# Altium PCB PBL4_PCB.PcbDoc (part 1 of 2)
Units mm, origin at the board's own origin, x right, y up, seen from the top; angles counter-clockwise.
Board outline 110 x 80 mm, 2 copper layers (Top Layer, Bottom Layer); 81 components, 62 nets, 303 pads, 24 vias.
Unrouted connection lines stored in the file: 115.
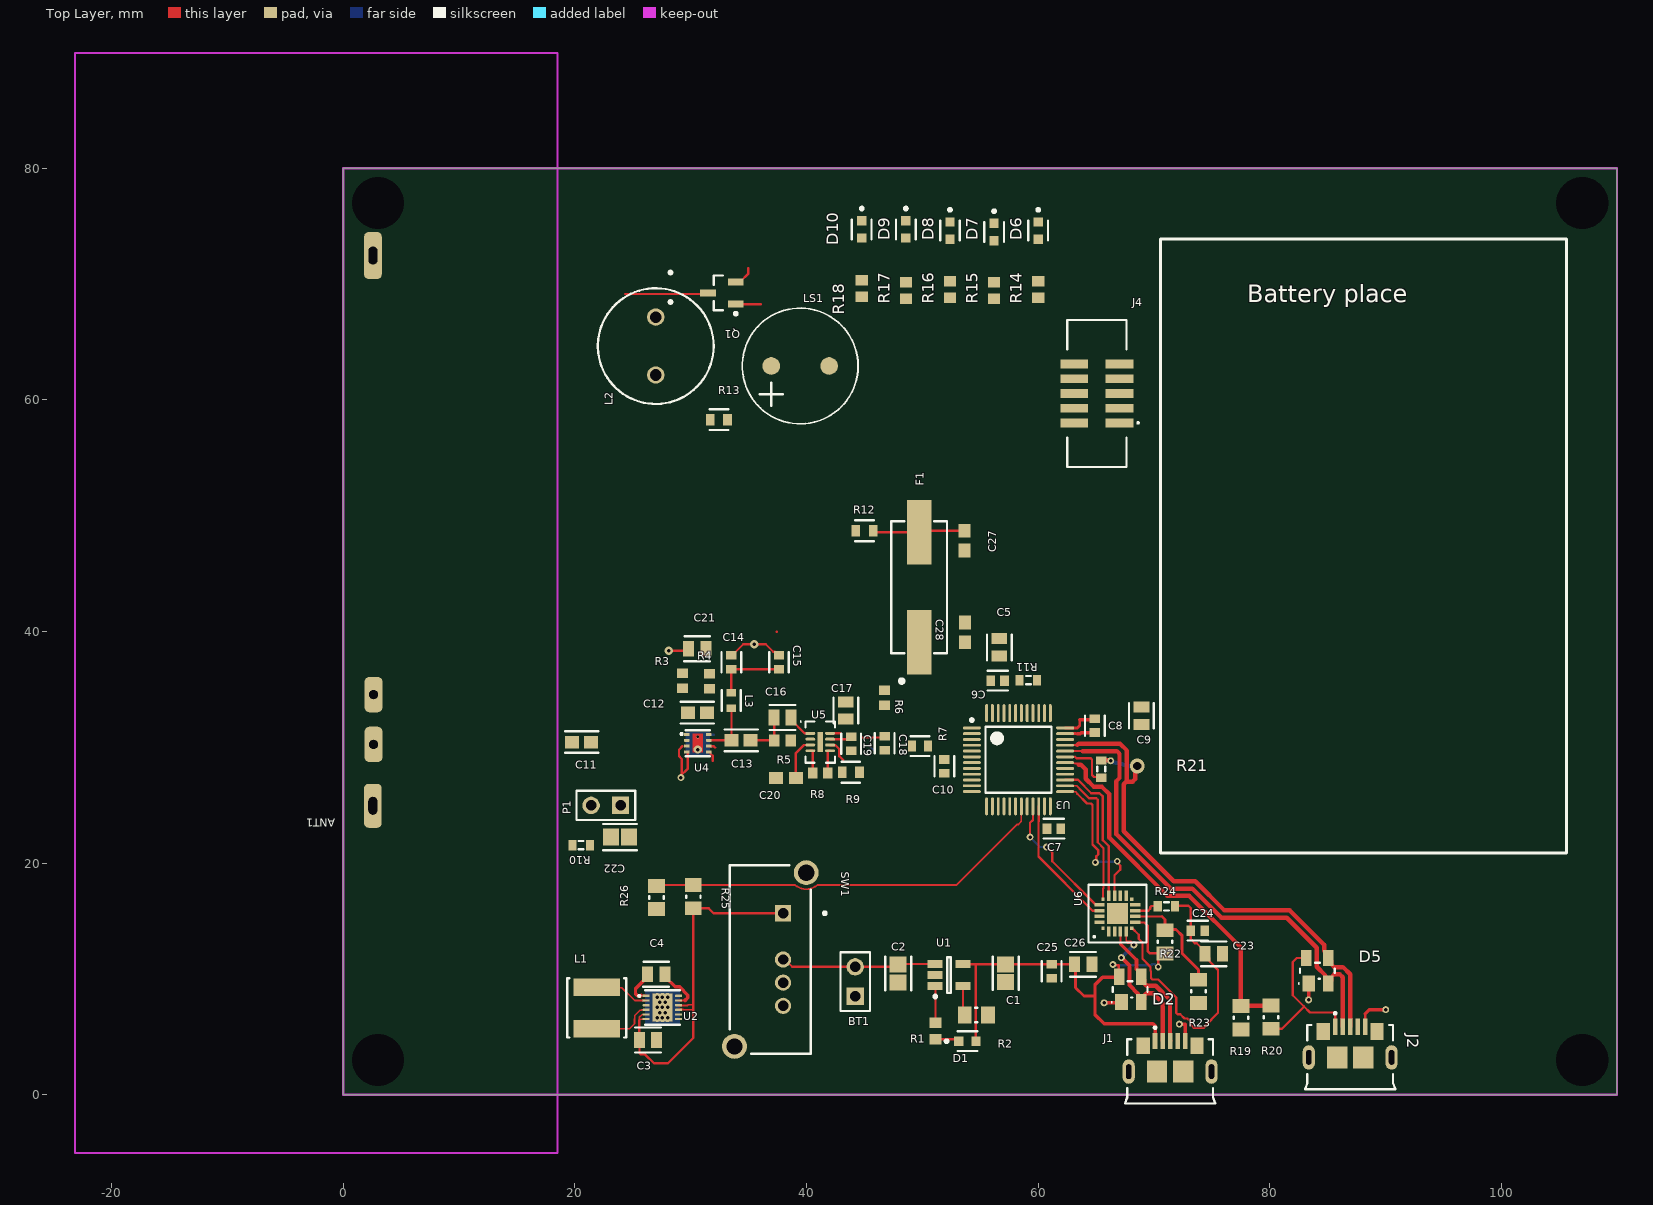
[diagram p0: Top Layer view]
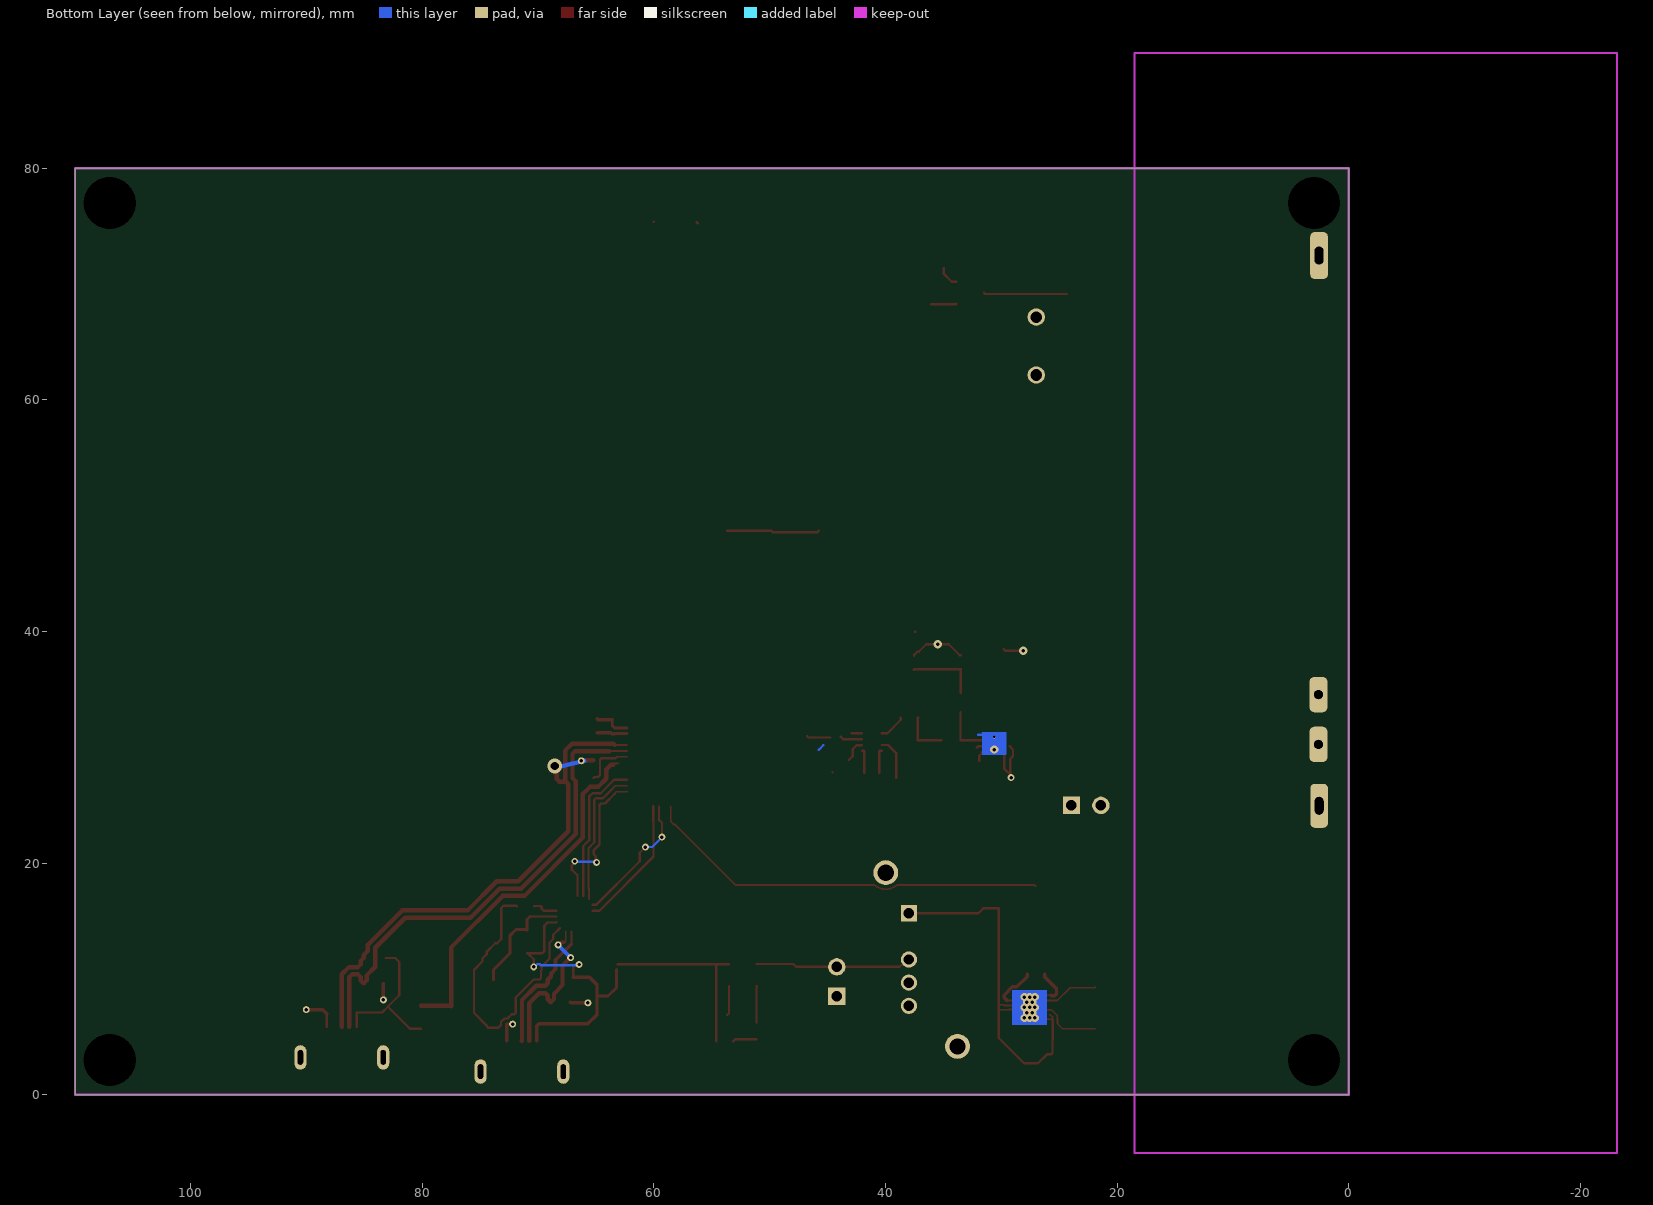
[diagram p1: Bottom Layer view, seen from below]

## Layer stack, top to bottom
Top Solder: solder mask 0.0102, Solder Resist, Dk 3.5
Top Layer: signal copper 0.0356
Dielectric 1: dielectric 0.32, FR-4, Dk 4.8
Bottom Layer: signal copper 0.0356
Bottom Solder: solder mask 0.0102, Solder Resist, Dk 3.5

## Board outline
0,0 0,80 110,80 110,0

## Design rules (kind name [scope] priority, off if disabled: settings)
Clearance [All] p1: gap=0.2 ignorepadtopadclearanceinfootprint=TRUE except(0: Arc-Hole Track-Hole SMDPad-Hole THPad-Hole Via-Hole Fill-Hole Poly-Hole Region-Hole Text-Hole)
DiffPairsRouting [All] p1: maxlimit=0.254 minlimit=0.254 mostfreqgap=0.254 toplayer_minwidth=0.15 toplayer_maxwidth=0.381 toplayer_prefwidth=0.381 bottomlayer_minwidth=0.15 bottomlayer_maxwidth=0.381 bottomlayer_prefwidth=0.381 maxuncoupledlength=12.7
PolygonConnect [All] p1: connectstyle=Relief reliefconductorwidth=0.254 reliefentries=4 polygonreliefangle="90 Angle" airgapwidth=0.254
RoutingVias [All] p1: holewidth=0.711 width=1.27 viastyle="Through Hole" minholewidth=0.711 minwidth=1.27 maxholewidth=0.711 maxwidth=1.27
SolderMaskExpansion [All] p1: expansion=0.102 istentingtop=FALSE
Width [All] p1: maxlimit=1 minlimit=0.15 preferedwidth=0.3
29 further rules are at their usual default settings.

## Classes and differential pairs
differential pair USB: +USB_P -USB_N
differential pair USB_UART: +USB_UART_P -USB_UART_N

## Components (designator, comment, footprint, x,y, rotation, side; value= is the part's Value field where it differs from the comment)
ANT1 "2195852-1" ANTENA 8.91,0.6 r90 top
BT1 "Battery" HDR1X2 44.21,8.5 r90 top
C1 "" FP-C2012-125-0_2-IPC_B 57.204,10.486 r270 top
C2 "" FP-C2012-125-0_2-IPC_B 47.92,10.47 r270 top
C3 "" FP-C0805C-DG-MFG 26.32,4.72 r0 top value=10μ
C4 "" FP-C0805C-DG-MFG 27.02,10.39 r0 top value=10μ
C5 "C0805C470J1GACTU" FP-C0805C-DN-MFG 56.66,38.625 r90 top value=10u
C6 "C0603C103K1RACTU" FP-C0603C-CF-MFG 56.51,35.75 r180 top value="10,000 pF"
C7 "C0603C103K1RACTU" FP-C0603C-CF-MFG 61.37,22.98 r0 top value="10,000 pF"
C8 "C0603C103K1RACTU" FP-C0603C-CF-MFG 64.905,31.87 r90 top value="10,000 pF"
C9 "C0805C470J1GACTU" FP-C0805C-DN-MFG 68.93,32.73 r270 top value=1u
C10 "C0603C103K1RACTU" FP-C0603C-CF-MFG 51.91,28.35 r270 top value="10,000 pF"
C11 "06035C102KAT2A" FP-0603-L_1_6_0_15-W_0_81-IPC_A 20.584,30.45 r0 top
C12 "06035C102KAT2A" FP-0603-L_1_6_0_15-W_0_81-IPC_A 30.58,32.996 r180 top
C13 "06035C102KAT2A" FP-0603-L_1_6_0_15-W_0_81-IPC_A 34.36,30.6 r0 top
C14 "C0603C103K1RACTU" FP-C0603C-CF-MFG 33.51,37.35 r270 top value="10,000 pF"
C15 "C0603C103K1RACTU" FP-C0603C-CF-MFG 37.631,37.35 r270 top value="10,000 pF"
C16 "C0805C470J1GACTU" FP-C0805C-DN-MFG 37.935,32.575 r0 top value=47p
C17 "C0805C470J1GACTU" FP-C0805C-DN-MFG 43.406,33.175 r270 top value=47p
C18 "C0603C104K5RACTU" FP-C0603C-CF-MFG 46.76,30.35 r270 top value="0.10 μF"
C19 "C0603C104K5RACTU" FP-C0603C-CF-MFG 43.856,30.3 r270 top value="0.10 μF"
C20 "06035J8R2BBSTR" CAPC1608X73X35ML10T15 38.235,27.35 r0 top
C21 "" FP-C0805C-DG-MFG 30.556,38.496 r180 top value=10μ
C22 "" FP-C2012-125-0_2-IPC_B 23.891,22.245 r0 top
C23 "C0805C470J1GACTU" FP-C0805C-DN-MFG 75.18,12.16 r0 top value=4u7
C24 "C0603C103K1RACTU" FP-C0603C-CF-MFG 73.8,14.17 r180 top value="10,000 pF"
C25 "C0603C103K1RACTU" FP-C0603C-CF-MFG 61.18,10.65 r90 top value="10,000 pF"
C26 "C0805C470J1GACTU" FP-C0805C-DN-MFG 63.89,11.25 r0 top value=4u7
C27 "06035J8R2BBSTR" CAPC1608X73X35ML10T15 53.66,47.85 r90 top
C28 "06035J8R2BBSTR" CAPC1608X73X35ML10T15 53.685,39.925 r90 top
D1 "LTST-C190GKT" FP-LTST-C190GKT-MFG 53.9,4.62 r0 top
D2 "SP0503BAHTG" LFUS-SOT143-4_V 67.96,9.09 r90 top
D5 "SP0503BAHTG" LFUS-SOT143-4_V 84.13,10.7 r90 top
D6 "LTST-C190GKT" FP-LTST-C190GKT-MFG 60.015,74.615 r270 top
D7 "LTST-C190GKT" FP-LTST-C190GKT-MFG 56.205,74.5 r270 top
D8 "LTST-C190GKT" FP-LTST-C190GKT-MFG 52.395,74.615 r270 top
D9 "LTST-C190GKT" FP-LTST-C190GKT-MFG 48.585,74.73 r270 top
D10 "LTST-C190GKT" FP-LTST-C190GKT-MFG 44.775,74.73 r270 top
F1 "12MHz" HC/49US-(AT49)_1 49.735,43.825 r90 top
J1 "USB3075-30-A" GCT_USB3075-30-A 70.105,4.64 r0 top
J2 "USB3075-30-A" GCT_USB3075-30-A 85.66,5.87 r0 top
J4 "SWD - STM32" 322110030000 65.085,60.55 r90 top
L1 "NRS5040T2R2NMGJ" FP-NR5040-H_4_1-MFG 21.88,7.49 r90 top
L2 "7447471104" "WE-TIS 1111" 26.985,64.65 r270 top
L3 "LQW18ANR10G00D" FP-LQW18AN_00-MFG 33.51,34.037 r90 top
LS1 "7BB-20-6L0" FP-7BB-20-6L0-MFG 39.46,62.93 r90 top
P1 "Reset" HDR1X2 23.945,24.985 r180 top
Q1 "BC847A" INF-SOT23_M 32.7,69.25 r180 top
R1 "ERJ-3EKF4700V" RESC1608X55X30ML15T15 51.15,5.5 r90 top
R2 "RC0805FR-073K3L" RESC2013X60X35ML10T20 54.67,6.88 r0 top
R3 "CRCW06030000Z0EA" RESC1609X50X30NL8T20 29.306,35.746 r90 top value=0
R4 "CRCW06030000Z0EA" RESC1609X50X30NL8T20 31.606,35.696 r90 top value=0
R5 "ERJ-3EKF52R3V" RESC1608X55X30ML15T15 37.935,30.6 r0 top
R6 "CRCW06030000Z0EA" RESC1609X50X30NL8T20 46.756,34.275 r90 top
R7 "MCT06030D5000BP100" FP-MCT0603-MFG 49.806,30.096 r180 top
R8 "CRCW06030000Z0EA" RESC1609X50X30NL8T20 41.185,27.775 r0 top
R9 "CRCW06031K00FKEA" FP-CRCW0603-e3-MFG 43.831,27.85 r0 top
R10 "Res3" J1-0603 20.54,21.55 r0 top value=10k
R11 "Res3" J1-0603 59.16,35.8 r180 top value=10k
R12 "CRCW06031K00FKEA" FP-CRCW0603-e3-MFG 45.01,48.7 r0 top
R13 "CRCW06031K00FKEA" FP-CRCW0603-e3-MFG 32.435,58.3 r0 top
R14 "ERJ-3EKF4700V" RESC1608X55X30ML15T15 60.015,69.535 r90 top
R15 "ERJ-3EKF4700V" RESC1608X55X30ML15T15 56.205,69.445 r90 top
R16 "ERJ-3EKF4700V" RESC1608X55X30ML15T15 52.395,69.535 r90 top
R17 "ERJ-3EKF4700V" RESC1608X55X30ML15T15 48.585,69.445 r90 top
R18 "ERJ-3EKF4700V" RESC1608X55X30ML15T15 44.775,69.625 r90 top
R19 "RC0805FR-073K3L" RESC2013X60X35ML10T20 77.52,6.64 r270 top
R20 "RC0805FR-073K3L" RESC2013X60X35ML10T20 80.12,6.69 r90 top
R21 "Res3" J1-0603 65.46,28.12 r90 top value=1k5
R22 "RC0805FR-073K3L" RESC2013X60X35ML10T20 70.97,13.2 r270 top
R23 "RC0805FR-073K3L" RESC2013X60X35ML10T20 73.87,8.92 r90 top
R24 "Res3" J1-0603 71.09,16.26 r180 top value=1k
R25 "RC0805FR-073K3L" RESC2013X60X35ML10T20 30.23,17.1 r90 top
R26 "RC0805FR-073K3L" RESC2013X60X35ML10T20 27.04,17.03 r270 top
SW1 "MHS133G04" Alcoswitch_MHS133G04_0 36.88,11.67 r90 top
U1 "MCP73832T-3ACI/OT" SOT-23-OT5_M 52.32,10.33 r0 top
U2 "ISL9110" KM_L12.3x3C 27.56,7.53 r0 top
U3 "STM32F103CBT6" STM-LQFP48_L 58.31,28.925 r0 top
U4 "TRF37D73" JD_WSON-8 30.61,30.35 r0 top
U5 "AD8319ACPZ-R7" ADI-CP-8-1_L 41.185,30.45 r0 top
U6 "CP2102N" ZW_QFN20 66.86,15.64 r90 top

## Footprints (in the part's own frame and the unit in brackets; to place one, negate y for a bottom-side part, rotate by r counter-clockwise, add the part's x,y. Pads: shape width x height; smd on the part's side, far side on the other; paste and mask are expansions set on the pad)
322110030000 [mm]
  rect 0.76x2.4 smd: 1(-2.54,-1.95) 2(-2.54,1.95) 3(-1.27,-1.95) 4(-1.27,1.95) 5(0,-1.95) 6(0,1.95) 7(1.27,-1.95) 8(1.27,1.95) 9(2.54,-1.95) 10(2.54,1.95)
  silkscreen extent -6.35,-3.6 6.35,2.55, body extent -6.32,-3.07 6.32,3.07, height 5.9
ADI-CP-8-1_L [mm] "SON, 8-Leads, Body 3x2mm, Pitch 0.5mm, Thermal Pad 1.75x0.45mm, IPC High Density"
  oval 0.85x0.25 smd: 1(-0.85,0.75) 2(-0.85,0.25) 3(-0.85,-0.25) 4(-0.85,-0.75) 5(0.85,-0.75) 6(0.85,-0.25) 7(0.85,0.25) 8(0.85,0.75)
  rect 0.45x1.75 smd: 9(0,0)
  silkscreen extent -1.72,-1.78 1.28,1.82, body extent -1.12,-1.63 1.13,1.63, height 1
Alcoswitch_MHS133G04_0 [mm]
  rect 1.4x1.4 hole 0.9 paste-1000 mask+0: 1(4,-1.1)
  round 1.4 hole 0.9 paste-1000 mask+0: 2(0,-1.1) 3(-2,-1.1) 4(-4,-1.1)
  round 2.15 hole 1.4 paste-1000 mask+0: 5(-7.5,3.1) 6(7.5,-3.1)
  silkscreen extent -8.15,-4.83 8.15,3.5, body extent -8.67,-4.28 8.67,4.28, height 0.25
ANTENA [mm] "Antena"
  rrect50% 3.8x1.524 hole 0.762 slot 1.52 at 0 deg: 1(24.35,6.353)
  rrect50% 3.05x1.524 hole 0.762 slot 0.76 at 0 deg: 2(29.65,6.3) 3(33.95,6.3)
  rrect50% 4.06x1.524 hole 0.762 slot 1.52 at 0 deg: 4(71.87,6.35)
  Keep-Out Layer region: -5.64,-9.59 89.36,-9.59 89.36,32.08 -5.64,32.08
  Keep-Out Layer lines w0.2: -5.64,32.08 -5.64,-9.59 89.36,-9.59 89.36,32.08 -5.64,32.08
  body extent 19.34,5.54 74.34,7.16, height 20
CAPC1608X73X35ML10T15 [mm] "Chip Capacitor, 2-Leads, Body 1.60x0.81mm, IPC Low Density"
  rect 1.2x1.05 smd: 1(-0.85,0) 2(0.85,0)
  body extent -0.85,-0.46 0.85,0.46, height 0.73
FP-7BB-20-6L0-MFG [mil]
  round 60 smd: 24(0,-98.43) 25(0,98.43)
  silkscreen extent -197,-197 197,197
FP-0603-L_1_6_0_15-W_0_81-IPC_A [mil]
  rect 47.5x42.06 smd paste+0 mask+0: 1(-32.51,0) 2(32.51,0)
  silkscreen extent -56,-37 56,37, body extent -31,-16 31,16, height 35
FP-C0603C-CF-MFG [mm]
  rect 0.75x0.9 smd paste+0 mask+0: 1(-0.6,0) 2(0.6,0)
  silkscreen extent -0.87,-0.85 0.88,0.85, body extent -1.2,-0.6 1.2,0.6, height 0.25
FP-C0805C-DG-MFG [mm]
  rect 0.95x1.35 smd paste+0 mask+0: 1(-0.75,0) 2(0.75,0)
  silkscreen extent -1.11,-1.08 1.1,1.07, body extent -1.4,-0.85 1.4,0.85, height 0.25
FP-C0805C-DN-MFG [mm]
  rect 0.95x1.35 smd paste+0 mask+0: 1(-0.75,0) 2(0.75,0)
  silkscreen extent -1.1,-1.07 1.1,1.07, body extent -1.4,-0.85 1.4,0.85, height 0.25
FP-C2012-125-0_2-IPC_B [mm]
  rect 1.378x1.456 smd paste+0 mask+0: 1(-0.764,0) 2(0.764,0)
  silkscreen extent -1.45,-1.13 1.45,1.13, body extent -1,-0.63 1,0.63, height 1.45
FP-CRCW0603-e3-MFG [mm]
  rect 0.75x1 smd paste+0 mask+0: 1(-0.75,0) 2(0.75,0)
  silkscreen extent -0.8,-0.9 0.8,0.9, body extent -0.78,-0.42 0.77,0.43, height 0.5
FP-LQW18AN_00-MFG [mm]
  rect 0.625x0.85 smd paste+0 mask+0: 1(-0.663,0) 2(0.663,0)
  silkscreen extent -0.9,-0.82 0.9,0.82, body extent -0.8,-0.4 0.8,0.4, height 1
FP-LTST-C190GKT-MFG [mm]
  rect 0.8x0.8 smd paste+0 mask+0: 1(-0.75,0) 2(0.75,0)
  silkscreen extent -1.92,-0.85 0.85,0.85, body extent -0.8,-0.4 0.8,0.4, height 0.9
FP-MCT0603-MFG [mm]
  rect 0.7x0.95 smd paste+0 mask+0: 1(-0.675,0) 2(0.675,0)
  silkscreen extent -0.8,-0.85 0.8,0.85, body extent -0.77,-0.42 0.78,0.42, height 0.55
FP-NR5040-H_4_1-MFG [mm]
  rect 1.5x4 smd paste+0 mask+0: 1(-1.8,0) 2(1.8,0)
  silkscreen extent -2.55,-2.55 2.55,2.55, body extent -2.65,-2.65 2.65,2.65, height 0.25
GCT_USB3075-30-A [mm]
  rect 0.4x1.4 smd: 1(0,0) 2(0.65,0) 3(1.3,0) 4(1.95,0) 5(2.6,0)
  rect 1.15x1.45 smd: S1(-1.02,-0.42) S2(3.62,-0.42)
  rect 1.75x1.9 smd: S3(0.175,-2.65) S4(2.425,-2.65)
  oval 1.05x2.1 hole 0.45 slot 1.25 at 90 deg: S5(-2.275,-2.65) S6(4.875,-2.65)
  silkscreen extent -2.6,-5.4 5.2,1.25
HC/49US-(AT49)_1 [mm]
  rect 5.6x2.1 smd: 1(-4.75,0) 2(4.75,0)
  silkscreen extent -8.23,-2.4 5.7,2.4, body extent -6.35,-2.35 6.35,2.35, height 1.5
HDR1X2 [mm] "Connector; Header; 2 Position"
  rect 1.5x1.5 hole 0.9: 1(0,0)
  round 1.5 hole 0.9: 2(2.54,0)
  silkscreen extent -1.27,-1.27 3.81,1.27
INF-SOT23_M [mm] "SOT23, 3-Leads, Body 2.9x1.3 mm, Pitch 0.95 mm, IPC Low Density"
  rect 1.35x0.6 smd: 1(-1.2,0.95) 2(-1.2,-0.95) 3(1.2,0)
  silkscreen extent -1.33,-1.5 0.7,1.92, body extent -0.7,-1.5 0.7,1.5, height 1.1
J1-0603 [mm] "Chip Resistor, Body 1.6x0.8mm, IPC High Density"
  rect 0.7x0.9 smd: 1(-0.75,0) 2(0.75,0)
  silkscreen extent -0.2,-0.35 0.2,0.35, body extent -0.85,-0.48 0.85,0.48, height 0.9
JD_WSON-8 [mm] "JD_WSON-8"
  rrect50% 0.5x0.25 smd paste+0: 1(-0.95,0.75) 2(-0.95,0.25) 3(-0.95,-0.25) 4(-0.95,-0.75) 5(0.95,-0.75) 6(0.95,-0.25) 7(0.95,0.25) 8(0.95,0.75)
  round 0.25 hole 0.2: 9(0,0.55)
  Top Layer region: -0.45,0.8 0.45,0.8 0.45,-0.8 -0.45,-0.8
  Bottom Layer region: -1.05,0.95 1.075,0.95 1.025,0.9 1.025,-0.975 -1,-0.975 -1.025,-0.95
  silkscreen extent -1.46,-1.13 1.05,1.11
KM_L12.3x3C [mm] "KM_L12.3x3C"
  rrect10% 0.6x0.2 smd: 1(-1.4,1)
  rrect50% 0.6x0.2 smd: 2(-1.4,0.6) 3(-1.4,0.2) 4(-1.4,-0.2) 5(-1.4,-0.6) 6(-1.4,-1) 7(1.4,-1) 8(1.4,-0.6) 9(1.4,-0.2) 10(1.4,0.2) 11(1.4,0.6) 12(1.4,1)
  rect 1.7x2.45 smd: PAD(0,0)
  Bottom Layer region: -1.5,1.5 1.5,1.5 1.5,-1.5 -1.5,-1.5
  silkscreen extent -2.05,-1.5 1.5,1.5
LFUS-SOT143-4_V [mm] "SOT143, 4-Leads, Body 3.04x1.4mm, Pitch 1.90mm"
  rect 1.4x1.1 smd: 1(-1.1,0.75)
  rect 1.4x0.9 smd: 2(-1.1,-0.95) 3(1.1,-0.95) 4(1.1,0.95)
  silkscreen extent -1.15,-1.5 0.7,1.65, body extent -0.7,-1.52 0.7,1.52, height 1.22
RESC1608X55X30ML15T15 [mm] "Chip Resistor, 2-Leads, Body 1.75x0.95mm, IPC Low Density"
  rect 0.9x1.05 smd: 1(-0.725,0) 2(0.725,0)
  body extent -0.87,-0.48 0.87,0.48, height 0.55
RESC1609X50X30NL8T20 [mm] "Chip Resistor, 2-Leads, Body 1.65x0.95mm, IPC Medium Density"
  rect 0.8x0.95 smd: 1(-0.65,0) 2(0.65,0)
  body extent -0.83,-0.48 0.82,0.47, height 0.5
RESC2013X60X35ML10T20 [mm] "Chip Resistor, 2-Leads, Body 2.1x1.35mm, IPC Low Density"
  rect 1.2x1.45 smd: 1(-1,0) 2(1,0)
  silkscreen extent -0.1,-0.63 0.1,0.63, body extent -1.05,-0.67 1.05,0.68, height 0.6
SOT-23-OT5_M [mm] "SOT23, 5-Leads, Body 2.9x1.7mm, Pitch 0.95mm, Lead Span 2.8mm, IPC Low Density"
  rect 1.3x0.7 smd: 1(-1.2,-0.95) 2(-1.2,0) 3(-1.2,0.95) 4(1.2,0.95) 5(1.2,-0.95)
  silkscreen extent -1.32,-1.97 0.15,1.55, body extent -0.9,-1.55 0.9,1.55, height 1.45
STM-LQFP48_L [mm] "QFP, 48-Leads, Body 7x7mm, Pitch 0.5mm, IPC High Density"
  oval 1.55x0.25 smd: 1(-4.025,2.75) 2(-4.025,2.25) 3(-4.025,1.75) 4(-4.025,1.25) 5(-4.025,0.75) 6(-4.025,0.25) 7(-4.025,-0.25) 8(-4.025,-0.75) 9(-4.025,-1.25) 10(-4.025,-1.75) 11(-4.025,-2.25) 12(-4.025,-2.75) 25(4.025,-2.75) 26(4.025,-2.25) 27(4.025,-1.75) 28(4.025,-1.25) 29(4.025,-0.75) 30(4.025,-0.25) 31(4.025,0.25) 32(4.025,0.75) 33(4.025,1.25) 34(4.025,1.75) 35(4.025,2.25) 36(4.025,2.75)
  oval 0.25x1.55 smd: 13(-2.75,-4.025) 14(-2.25,-4.025) 15(-1.75,-4.025) 16(-1.25,-4.025) 17(-0.75,-4.025) 18(-0.25,-4.025) 19(0.25,-4.025) 20(0.75,-4.025) 21(1.25,-4.025) 22(1.75,-4.025) 23(2.25,-4.025) 24(2.75,-4.025) 37(2.75,4.025) 38(2.25,4.025) 39(1.75,4.025) 40(1.25,4.025) 41(0.75,4.025) 42(0.25,4.025) 43(-0.25,4.025) 44(-0.75,4.025) 45(-1.25,4.025) 46(-1.75,4.025) 47(-2.25,4.025) 48(-2.75,4.025)
  silkscreen extent -4.15,-2.85 2.85,3.55, body extent -3.5,-3.5 3.5,3.5, height 1.6
"WE-TIS 1111" [mm] "THT, 2-Leads, Body 11,0x11,0mm, Pitch 5mm"
  round 1.5 hole 1: 1(-2.5,0) 2(2.5,0)
  silkscreen extent -6.47,-5 5,5, body extent -7.46,-7.5 7.53,7.5, height 10.5
ZW_QFN20 [mm] "ZW_QFN20"
  rect 0.3x0.3 smd: 1(-1.25,1.25) 6(-1.25,-1.25) 11(1.25,-1.25) 16(1.25,1.25)
  rect 0.9x0.3 smd: 2(-1.55,0.75) 3(-1.55,0.25) 4(-1.55,-0.25) 5(-1.55,-0.75) 12(1.55,-0.75) 13(1.55,-0.25) 14(1.55,0.25) 15(1.55,0.75)
  rect 0.3x0.9 smd: 7(-0.75,-1.55) 8(-0.25,-1.55) 9(0.25,-1.55) 10(0.75,-1.55) 17(0.75,1.55) 18(0.25,1.55) 19(-0.25,1.55) 20(-0.75,1.55)
  rect 1.8x1.8 smd: 21(0,0)
  silkscreen extent -2.5,-2.5 2.5,2.5

## Part data
BT1: library part KM_Battery_One_Cell
C1 C2: library part CMP-08246-000007-2, "Multilayer Ceramic Capacitors 4.7μF ±10% 50V X5R SMD 0805", Capacitance=4μ7, Case Code (Imperial)=0805, Case Code (Metric)=2012, Dielectric=X5R, Dielectric Material=Ceramic, Max Operating Temperature=85°C, Min Operating Temperature=-55°C, Package Quantity=1, Tolerance=10%, Voltage=50V, Case/Package=0805, Construction=Flat, Depth=1.25mm, Height=1.25mm, Lead Free="Lead Free", Length=2mm, Mount="Surface Mount", Packaging="Tape and Reel", Radiation Hardening=No, REACH SVHC="No SVHC", Resistor Type=Ceramic, Series=C, Termination=SMD/SMT, Thickness=0.057inch, Voltage Rating=50V, Voltage Rating (DC)=50V, Weight=0.000194oz, Width=0.049inch
C3 C4 C21: library part CMP-2007-03243-2, "CAP CER 10UF 10V X5R 0805", 3DS Part Number=220-00001, Capacitance=10uF, Manufacturer=Kemet, Manufacturer Part Number=C0805C106K8PACTU, Package=C0805C-DG, Temperature="-55°C to +85°C", Temperature Characteristic=X5R, Temperature Coefficient=15%, Temperature Range High=+85°C, Temperature Range Low=-55°C, Tolerance=10%, Voltage=10V, Automotive=No, Category=Cap, ComponentLink2Description=Datasheet, ComponentLink2URL=https://content.kemet.com/datasheets/KEM_C1006_X5R_SMD.pdf, Device Class L1="Passive Components", Device Class L2=Capacitors, Device Class L3="Ceramic Capacitors", Digikey Description="CAP CER 10UF 10V X5R 0805", Height=1.4mm, Ipc Land Pattern Name=CAPC200125X125, Lead Free=Yes, Material=Ceramic, Mouser Description="CAP CER 10UF 10V X5R 0805", Octopart=https://octopart.com/c0805c106k8pactu-kemet-98697, RoHS=TRUE, Voltage Rating=10V
C5 C9 C16 C17 C23 C26: library part CMP-1036-01631-3, "CAP CER 47PF 100V 5% NP0 0805", Capacitance="47 pF", Manufacturer=KEMET, Package=C0805C-DN, Temperature="-55°C to +125°C", Temperature Characteristic=C0G, Temperature Coefficient=30ppm/°C, Temperature Range High=+125°C, Temperature Range Low=-55°C, Tolerance=0.05, Voltage Rating="100 V", Automotive=No, Category=Cap, ComponentLink2Description=Datasheet, ComponentLink2URL=https://content.kemet.com/datasheets/KEM_C1003_C0G_SMD.pdf, Device Class L1="Passive Components", Device Class L2=Capacitors, Device Class L3="Ceramic Capacitors", Digikey Description="CAP CER 47PF 100V 5% NP0 0805", Height=0.88mm, Ipc Land Pattern Name=CAPC200125X78, Lead Free=Yes, Manufacturer Part Number=C0805C470J1GACTU, Material=Ceramic, Mouser Description="Capacitor: ceramic; MLCC; 47pF; 100V; C0G; ±5%; SMD; 0805", Octopart=https://octopart.com/c0805c470j1gactu-kemet-9138638, RoHS=TRUE
C6 C7 C8 C10 C24 C25: library part CMP-2006-03036-2, "CAP CER 10000PF 100V X7R 0603", Capacitance=100n, Manufacturer=KEMET, Package=C0603C-CF, Temperature="-55°C to +125°C", Temperature Characteristic=X7R, Temperature Coefficient=30ppm/°C, Temperature Range High=+125°C, Temperature Range Low=-55°C, Tolerance=0.1, Voltage Rating="100 V", Automotive=Yes, Automotive Grade="Grade 1", Category=Cap, ComponentLink2Description=Datasheet, ComponentLink2URL=https://api.kemet.com/component-edge/download/datasheet/C0603C100J5GACAUTO.pdf, Device Class L1="Passive Components", Device Class L2=Capacitors, Device Class L3="Ceramic Capacitors", Digikey Description="CAP CER 10000PF 100V X7R 0603", Height=0.87mm, Lead Free=Yes, Manufacturer Part Number=C0603C103K1RACTU, Material=Ceramic, Mouser Description="Multilayer Ceramic Capacitors MLCC - SMD/SMT 100volts 10000pF X7R 10%", Octopart=https://octopart.com/c0603c103k1ractu-kemet-134140, RoHS=TRUE
C11 C12 C13: library part CMP-2006-04378-2, "General Purpose Ceramic Capacitor, 0603, 1nF, 10%, X7R, 15%, 50V", Capacitance=1n, Case Code (Imperial)=0603, Case Code (Metric)=1608, Dielectric=X7R, Dielectric Material=Ceramic, Max Operating Temperature=125°C, Min Operating Temperature=-55°C, Package Quantity=4000, Tolerance=10%, Voltage=50V, Case/Package=0603, Construction=Flat, Contact Plating=Tin, Depth=0.81mm, Height=0.9mm, Lead Free="Lead Free", Length=1.6mm, Mount="Surface Mount", Number of Pins=2, Packaging="Tape and Reel", Radiation Hardening=No, REACH SVHC="No SVHC", RoHS Compliant=Yes, Series=-, Termination=SMD/SMT, Thickness=0.035inch, Voltage Rating=50V, Voltage Rating (DC)=50V, Weight=7.1E-05oz, Width=0.032inch
C14 C15: library part CMP-2006-03036-2, "CAP CER 10000PF 100V X7R 0603", Capacitance=10n, Manufacturer=KEMET, Package=C0603C-CF, Temperature="-55°C to +125°C", Temperature Characteristic=X7R, Temperature Coefficient=30ppm/°C, Temperature Range High=+125°C, Temperature Range Low=-55°C, Tolerance=0.1, Voltage Rating="100 V", Automotive=Yes, Automotive Grade="Grade 1", Category=Cap, ComponentLink2Description=Datasheet, ComponentLink2URL=https://api.kemet.com/component-edge/download/datasheet/C0603C100J5GACAUTO.pdf, Device Class L1="Passive Components", Device Class L2=Capacitors, Device Class L3="Ceramic Capacitors", Digikey Description="CAP CER 10000PF 100V X7R 0603", Height=0.87mm, Lead Free=Yes, Manufacturer Part Number=C0603C103K1RACTU, Material=Ceramic, Mouser Description="Multilayer Ceramic Capacitors MLCC - SMD/SMT 100volts 10000pF X7R 10%", Octopart=https://octopart.com/c0603c103k1ractu-kemet-134140, RoHS=TRUE
C18: library part CMP-2006-03061-2, "CAP CER 0.1UF 50V X7R 0603", Capacitance=100p, Manufacturer=KEMET, Package=C0603C-CF, Temperature="-55°C to +125°C", Temperature Characteristic=X7R, Temperature Coefficient=30ppm/°C, Temperature Range High=+125°C, Temperature Range Low=-55°C, Tolerance=0.1, Voltage Rating="50 V", Automotive=Yes, Automotive Grade="Grade 1", Category=Cap, ComponentLink2Description=Datasheet, ComponentLink2URL=https://api.kemet.com/component-edge/download/datasheet/C0603C100J5GACAUTO.pdf, Device Class L1="Passive Components", Device Class L2=Capacitors, Device Class L3="Ceramic Capacitors", Digikey Description="CAP CER 0.1UF 50V X7R 0603", Height=0.87mm, Lead Free=Yes, Manufacturer Part Number=C0603C104K5RACTU, Material=Ceramic, Octopart=https://octopart.com/c0603c104k5ractu-kemet-139244, RoHS=TRUE
C19: library part CMP-2006-03061-2, "CAP CER 0.1UF 50V X7R 0603", Capacitance=100n, Manufacturer=KEMET, Package=C0603C-CF, Temperature="-55°C to +125°C", Temperature Characteristic=X7R, Temperature Coefficient=30ppm/°C, Temperature Range High=+125°C, Temperature Range Low=-55°C, Tolerance=0.1, Voltage Rating="50 V", Automotive=Yes, Automotive Grade="Grade 1", Category=Cap, ComponentLink2Description=Datasheet, ComponentLink2URL=https://api.kemet.com/component-edge/download/datasheet/C0603C100J5GACAUTO.pdf, Device Class L1="Passive Components", Device Class L2=Capacitors, Device Class L3="Ceramic Capacitors", Digikey Description="CAP CER 0.1UF 50V X7R 0603", Height=0.87mm, Lead Free=Yes, Manufacturer Part Number=C0603C104K5RACTU, Material=Ceramic, Octopart=https://octopart.com/c0603c104k5ractu-kemet-139244, RoHS=TRUE
C20: library part CMP-2006-04640-1, Capacitance=8p2, Manufacturer="AVX Interconnect / Elco", Part Number=06035J8R2BBSTR
C22: library part CMP-08246-000007-2, "Multilayer Ceramic Capacitors 4.7μF ±10% 50V X5R SMD 0805", Capacitance=100n, Case Code (Imperial)=0805, Case Code (Metric)=2012, Dielectric=X5R, Dielectric Material=Ceramic, Max Operating Temperature=85°C, Min Operating Temperature=-55°C, Package Quantity=1, Tolerance=10%, Voltage=50V, Case/Package=0805, Construction=Flat, Depth=1.25mm, Height=1.25mm, Lead Free="Lead Free", Length=2mm, Mount="Surface Mount", Packaging="Tape and Reel", Radiation Hardening=No, REACH SVHC="No SVHC", Resistor Type=Ceramic, Series=C, Termination=SMD/SMT, Thickness=0.057inch, Voltage Rating=50V, Voltage Rating (DC)=50V, Weight=0.000194oz, Width=0.049inch
C27 C28: library part CMP-2006-04640-1, Capacitance=18p, Manufacturer="AVX Interconnect / Elco", Part Number=06035J8R2BBSTR
D1 D6 D7 D8 D9 D10: library part CMP-22017-000005-2, "LED GREEN CLEAR CHIP SMD", Case Code (Imperial)=0603, Case Code (Metric)=1608, Color=Green, Forward Current=30mA, Forward Voltage=2.1V, Lens Color=Colorless, Max Operating Temperature=85°C, Min Operating Temperature=-55°C, Package Quantity=1, Power Dissipation=100mW, Reverse Voltage=5V, Test Current=10mA, Voltage=2V, Case/Package=0603, Depth=0.8mm, Dominant Wavelength=569nm, Height=0.8mm, Illumination Color=Green, Lead Free="Lead Free", Length=1.6mm, Lens Style=Clear, Lens Transparency=Clear, Luminous Intensity=6mcd, Mount="Surface Mount", Number of Elements=1, Number of LEDs=1, Number of Pins=2, Packaging="Tape and Reel", Power Rating=100mW, Radiation Hardening=No, Viewing Angle=130°, Wavelength=565nm, Width=0.8mm
D2 D5: library part CMP-2000-05191-1, "TVS Diode Array, 30 pF, 30 KV, -40 to 85 degC, 4-Pin SOT143, RoHS, Tape and Reel", Capacitance Value=30pF, Clamping Voltage=8V, Leakage Current=0.1uA, Manufacturer=Littelfuse, Operating Temp Range=-40Cto85C, Operating Temperature Classification=Industrial, Operating Temperature Max Deg. C=85C, Operating Temperature Min Deg. C=-40C, Package / Case=SOT-143, Reverse Stand-off Voltage=5.5(Min)V, Working Voltage=5.5V, Working Voltage (Max)=5.5V(Min), Clamping Voltage (Max)=8V, Configuration=Triple, Datasheet URL=https://datasheet.ciiva.com/15143/getdatasheetpartid-116020-15143550.pdf, Datasheet Version=Dec-13, Direction Type=Uni-Directional, Leakage Current (Max)=0.1uA, Manufacturer URL=http://www.littelfuse.com/, Mounting=SurfaceMount, Mounting Style=SurfaceMount, Number of Elements=3, Package Type=SOT-143, Packaging=TapeandReel, Pin Count=3+Tab, Polarity=Uni-Directional, Product Depth (mm)=1.4mm, Product Height (mm)=1.05mm, Product Length (mm)=3.04mm, Rad Hardened=No, Suppressor Type=TVS
F1: library part ABLS-12.000MHZ-B4-T, Manufacturer_Name=ABRACON, Mouser Part Number=815-ABLS-12.0M-T, Arrow Part Number=ABLS-12.000MHZ-B4-T, Arrow Price/Stock=https://www.arrow.com/en/products/abls-12.000mhz-b4-t/abracon?region=nac, Datasheet Link=https://componentsearchengine.com/Datasheets/2/ABLS-12.000MHZ-B4-T.pdf, Manufacturer_Part_Number=ABLS-12.000MHZ-B4-T, Mouser Price/Stock=https://www.mouser.co.uk/ProductDetail/ABRACON/ABLS-12000MHZ-B4-T?qs=yTU0IcKoRlGSQ8ooxPPVnQ%3D%3D
J1 J2: "USB - micro B USB 2.0 Receptacle Connector 5 Position Surface Mount, Right Angle; Through Hole", Package=None, Digi-Key_Part_Number=2073-USB3075-30-ACT-ND, Digi-Key_Purchase_URL=https://www.digikey.com/product-detail/en/gct/USB3075-30-A/2073-USB3075-30-ACT-ND/9859705?utm_source=snapeda&utm_medium=aggregator&utm_campaign=symbol, MF="Global Connector Technology", MP=USB3075-30-A, SnapEDA_Link=https://www.snapeda.com/parts/USB3075-30-A/Global%20Connector%20Technology/view-part/229370/?ref=snap
J4: library part 3221-10-0300-00, "Connector", Manufacturer_Name="CNC Tech", Arrow Part Number=3221-10-0300-00, Arrow Price/Stock=https://www.arrow.com/en/products/3221-10-0300-00/cnc-tech-llc, Datasheet Link=http://cnctech.us/pdfs/3221-XX-0300-00.pdf, Height=5.8mm, Manufacturer_Part_Number=3221-10-0300-00
L1: library part CMP-14484-000953-1, "SMD Power Inductors 2.2uH ±30% 3.7A 28.6mΩ", Case/Package=Nonstandard, Current Rating=3.7A, DC Resistance (DCR)=28.6mR, Inductance=2μ2, Max Operating Temperature=120°C, Min Operating Temperature=-25°C, Resistor Type=Wirewound, Saturation Current=5A, Self Resonant Frequency=42MHz, Test Frequency=100kHz, Tolerance=20%, Core Material=Ferrite, Mount="Surface Mount", Packaging="Tape and Reel", RoHS Compliant=Yes, Shielding=Shielded
L2: library part CMP-1406-00011-1, "Shielded Radial Leaded Wire Wound Inductor WE-TIS, L=100000 µH", Inductance=100m, Manufacturer="Wuerth Elektronik", ComponentLink1Description="Manufacturer URL", ComponentLink1URL=http://www.we-online.com, ComponentLink2Description=Datasheet, ComponentLink2URL=http://www.we-online.de/katalog/media/pdf/7447471104.pdf, PackageReference="WE-TIS 1111", PartNumber=7447471104
L3: library part CMP-06042-014178-1, "Wire Wound RF Inductor 100nH ±2% 220mA 0.68Ω 0603 (1608)", Case Code (Imperial)=0603, Case Code (Metric)=1608, Current=140mA, Current Rating=220mA, DC Resistance (DCR)=680mR, Inductance=100n, Inductance Tolerance=2%, Max Operating Temperature=125°C, Min Operating Temperature=-55°C, Package Quantity=4000, Resistor Type=Wirewound, Self Resonant Frequency=1.8GHz, Test Frequency=100MHz, Case/Package=0603, Core Material=Non-Magnetic, DC Current=220mA, Depth=1mm, Height=0.8mm, Height - Seated (Max)=0.039inch, Lead Free="Lead Free", Length=1.6mm, Max DC Current=220mA, Military Standard=Not, Mount="Surface Mount", Number of Pins=2, Packaging="Tape and Reel", Q Factor=34, Radiation Hardening=No, REACH SVHC="No SVHC", Series Resistance=680mR, Shielding=Unshielded, Termination=SMD/SMT, Tolerance=2%, Weight=0.000106oz, Width=0.8mm
LS1: library part CMP-06202-000037-1, "BUZZER ELEMENT STD 6.3KHZ", Capacitance=10nF, Frequency=6.3kHz, Insulation Resistance=100MR, Max Operating Temperature=40°C, Min Operating Temperature=-10°C, Package Quantity=600, Diameter=20mm, Height=0.42mm, Impedance=1kR, Lead Free="Contains Lead", Lead Length=50mm, Max Frequency=6.3kHz, Mount=Wire, Outside Diameter=20mm, Packaging=Bulk, Radiation Hardening=No, REACH SVHC="No SVHC", Self Resonant Frequency=6.3kHz, Series=7BB, Size=0.79inch, Termination="Wire Leads"
P1: library part "Header 2", "Header, 2-Pin", LatestRevisionDate=17-Jul-2002, LatestRevisionNote="Re-released for DXP Platform.", Publisher="Altium Limited"
Q1: library part CMP-1177-00033-1, "NPN Silicon AF Transistor, 45 V VCEO, 100 mA IC, SOT23, Reel, Green", Manufacturer=Infineon, ComponentLink1Description="Manufacturer URL", ComponentLink1URL=http://www.infineon.com/, ComponentLink2Description=Datasheet, ComponentLink2URL=http://www.infineon.com/dgdl/bc847series_bc848series_bc849series_bc850series.pdf?folderId=db3a304314dca389011541d30fa21656&fileId=db3a304314dca389011541d4630a1657, ComponentLink3Description="Package Specification", ComponentLink3URL=http://www.infineon.com/dgdl/SOT23-Package_Overview.pdf?folderId=db3a30431936bc4b0119532290053c66&fileId=db3a30431936bc4b0119533468123c85, fT (typ)="250Â MHz", Green=TRUE, IBM (max)="200Â mA", IC (max)="100Â mA", ICBO (max)="15Â nA", ICM (max)="200Â mA", Mounting Technology="Surface Mount", PackageDescription="3-Pin Small Outline Transistor Package, 1.3 x 2.9 mm Body, 0.95 mm Pitch", PackageReference=SOT23, PackageVersion=Apr-08, Packing=Reel, PartNumber=BC847A, Polarity=NPN, Ptot (max)="330Â mW", VCBO (max)="50Â V", VCEO (max)="45Â V", VEBO (max)="6Â V"
R1 R14 R15 R16 R17 R18: library part CMP-1012-00473-6, "Chip Resistor, 470 Ohm, +/- 1%, 0.1 W, -55 to 155 degC, 0603 (1608 Metric), RoHS, Tape and Reel", Manufacturer=Panasonic, Max Operating Temperature="155 degC", Min Operating Temperature="-55 degC", Package Quantity=1, resistance=470, Voltage Rating="75 V", ComponentLink1Description="Manufacturer URL", ComponentLink1URL=http://www.panasonic.com/, ComponentLink2Description=Datasheet, ComponentLink2URL=http://industrial.panasonic.com/cdbs/www-data/pdf/RDA0000/AOA0000C86.pdf, ComponentLink3Description="Package Specification", ComponentLink3URL=https://datasheet.ciiva.com/11808/0900766b80f806dd-11808207.pdf, DatasheetVersion=04/2015, Height="0.45 mm", Length="1.6 mm", Mount="Surface Mount", Mounting Technology="Surface Mount", PackageDescription="2-Pin Surface Mount Device, Body 1.6 x 0.85 mm", PackageReference=0603, Packaging="Tape and Reel", Pins=2, REACH SVHC=Yes, RoHSCompliant=true
R2: library part CMP-1013-00567-2, "Chip Resistor, 3.3 KOhm, +/- 1%, 0.125 W, -55 to 155 degC, 0805 (2012 Metric), RoHS, Tape and Reel", Case Code (Imperial)=0805, Case Code (Metric)=2012, Manufacturer=Yageo, Max Operating Temperature=155degC, Max Power Dissipation=125mW, Min Operating Temperature=-55degC, Package Description="2-Pin Surface Mounted Device, Body 2 x 1.25 mm", Package Quantity=1, resistance=3k3, Temperature Coefficient=100ppm/degreesC, Tolerance=1%, Voltage Rating=150V, Case/Package=0805, Composition=ThickFilm, Datasheet URL=http://www.yageo.com/NewPortal/yageodocoutput?fileName=/pdf/R-Chip/PYu-RC_Group_51_RoHS_L_5.pdf, Datasheet Version="Rev. 5, 10/2016", Depth=1.25mm, Height=0.5mm, Lead Free=LeadFree, Length=2mm, Manufacturer URL=http://www.yageo.com/, Number of Terminations=2, Package Reference=0805, Packaging=TapeandReel, Power Rating=125mW, REACH SVHC=NoSVHC, RoHSCompliant=true, Termination=SMD/SMT, Weight=0.000194oz, Width=0.049inch
R3 R4: library part CMP-2000-03816-5, "Chip Resistor, 0 Ohm, Jumper, 100 mW, -55 to 155 degC, 0603 (1608 Metric), RoHS, Tape and Reel", Manufacturer="Vishay Semiconductor", Max Operating Temperature="155 degC", Min Operating Temperature="-55 degC", Package Quantity=5000, Voltage Rating="75 V", ComponentLink1Description="Manufacturer URL", ComponentLink1URL=http://www.vishay.com/, ComponentLink2Description=Datasheet, ComponentLink2URL=http://www.vishay.com/docs/20035/dcrcwe3.pdf, DatasheetVersion=06/2012, Length="1.55 mm", Mount="Surface Mount", Mounting Technology="Surface Mount", PackageDescription="2-Pin Surface Mount Device, Body 1.575 x 0.85 mm", PackageReference=0603, Packaging="Tape and Reel", Pins=2, REACH SVHC=Unknown, RoHSCompliant=true
  R3: Height=0.45mm
  R4: Height="0.45 mm"
R5: library part CMP-2000-00553-1, Manufacturer=Panasonic, resistance=52R3, Part Number=ERJ-3EKF52R3V
R6 R8: library part CMP-2000-03816-5, "Chip Resistor, 0 Ohm, Jumper, 100 mW, -55 to 155 degC, 0603 (1608 Metric), RoHS, Tape and Reel", Manufacturer="Vishay Semiconductor", Max Operating Temperature="155 degC", Min Operating Temperature="-55 degC", Package Quantity=5000, resistance=0, Voltage Rating="75 V", ComponentLink1Description="Manufacturer URL", ComponentLink1URL=http://www.vishay.com/, ComponentLink2Description=Datasheet, ComponentLink2URL=http://www.vishay.com/docs/20035/dcrcwe3.pdf, DatasheetVersion=06/2012, Height="0.45 mm", Length="1.55 mm", Mount="Surface Mount", Mounting Technology="Surface Mount", PackageDescription="2-Pin Surface Mount Device, Body 1.575 x 0.85 mm", PackageReference=0603, Packaging="Tape and Reel", Pins=2, REACH SVHC=Unknown, RoHSCompliant=true
R7: library part CMP-02407-010017-1, "RES SMD 100 OHM 1% 1/8W 0603", Case/Package=0603, resistance=500, Tolerance=0.1%, Height=450um, Lead Free="Lead Free", Length=1.55mm, Width=850um
R9 R13: library part CMP-1666-00003-5, "RES Thick Film, 1kΩ, 1%, 0.1W, 100ppm/°C, 0603", Case Code (Imperial)=0603, Case Code (Metric)=1608, Max Operating Temperature=155°C, Max Power Dissipation=100mW, Min Operating Temperature=-55°C, Package Quantity=10, resistance=1k, Temperature Coefficient=100ppm/°C, Tolerance=1%, Voltage Rating=75V, Case/Package=0603, Composition="Thick Film", Contact Plating=Tin, Depth=0.85mm, Features="Automotive AEC-Q200", Height=0.45mm, Lead Free="Lead Free", Length=1.55mm, Military Standard=Not, Mount="Surface Mount", Number of Pins=2, Number of Terminations=2, Packaging="Tape and Reel", Power Rating=100mW, Radiation Hardening=No, Termination=SMD/SMT, Voltage Rating (DC)=75V, Weight=7.1E-05oz, Width=0.033inch
R10 R11 R21 R24: "Resistor", LatestRevisionDate=29-May-2009, LatestRevisionNote="IPC-7351 Footprint Added.", PackageDescription="Chip Resistor", PackageReference=J1-0603, Published=8-Jun-2000, Publisher="Altium Limited"
R12: library part CMP-1666-00003-5, "RES Thick Film, 1kΩ, 1%, 0.1W, 100ppm/°C, 0603", Case Code (Imperial)=0603, Case Code (Metric)=1608, Max Operating Temperature=155°C, Max Power Dissipation=100mW, Min Operating Temperature=-55°C, Package Quantity=10, resistance=270, Temperature Coefficient=100ppm/°C, Tolerance=1%, Voltage Rating=75V, Case/Package=0603, Composition="Thick Film", Contact Plating=Tin, Depth=0.85mm, Features="Automotive AEC-Q200", Height=0.45mm, Lead Free="Lead Free", Length=1.55mm, Military Standard=Not, Mount="Surface Mount", Number of Pins=2, Number of Terminations=2, Packaging="Tape and Reel", Power Rating=100mW, Radiation Hardening=No, Termination=SMD/SMT, Voltage Rating (DC)=75V, Weight=7.1E-05oz, Width=0.033inch
R19 R23 R26: library part CMP-1013-00567-2, "Chip Resistor, 3.3 KOhm, +/- 1%, 0.125 W, -55 to 155 degC, 0805 (2012 Metric), RoHS, Tape and Reel", Case Code (Imperial)=0805, Case Code (Metric)=2012, Manufacturer=Yageo, Max Operating Temperature=155degC, Max Power Dissipation=125mW, Min Operating Temperature=-55degC, Package Description="2-Pin Surface Mounted Device, Body 2 x 1.25 mm", Package Quantity=1, resistance=10k, Temperature Coefficient=100ppm/degreesC, Tolerance=1%, Voltage Rating=150V, Case/Package=0805, Composition=ThickFilm, Datasheet URL=http://www.yageo.com/NewPortal/yageodocoutput?fileName=/pdf/R-Chip/PYu-RC_Group_51_RoHS_L_5.pdf, Datasheet Version="Rev. 5, 10/2016", Depth=1.25mm, Height=0.5mm, Lead Free=LeadFree, Length=2mm, Manufacturer URL=http://www.yageo.com/, Number of Terminations=2, Package Reference=0805, Packaging=TapeandReel, Power Rating=125mW, REACH SVHC=NoSVHC, RoHSCompliant=true, Termination=SMD/SMT, Weight=0.000194oz, Width=0.049inch
R20 R22 R25: library part CMP-1013-00567-2, "Chip Resistor, 3.3 KOhm, +/- 1%, 0.125 W, -55 to 155 degC, 0805 (2012 Metric), RoHS, Tape and Reel", Case Code (Imperial)=0805, Case Code (Metric)=2012, Manufacturer=Yageo, Max Operating Temperature=155degC, Max Power Dissipation=125mW, Min Operating Temperature=-55degC, Package Description="2-Pin Surface Mounted Device, Body 2 x 1.25 mm", Package Quantity=1, resistance=4k7, Temperature Coefficient=100ppm/degreesC, Tolerance=1%, Voltage Rating=150V, Case/Package=0805, Composition=ThickFilm, Datasheet URL=http://www.yageo.com/NewPortal/yageodocoutput?fileName=/pdf/R-Chip/PYu-RC_Group_51_RoHS_L_5.pdf, Datasheet Version="Rev. 5, 10/2016", Depth=1.25mm, Height=0.5mm, Lead Free=LeadFree, Length=2mm, Manufacturer URL=http://www.yageo.com/, Number of Terminations=2, Package Reference=0805, Packaging=TapeandReel, Power Rating=125mW, REACH SVHC=NoSVHC, RoHSCompliant=true, Termination=SMD/SMT, Weight=0.000194oz, Width=0.049inch
U1: library part CMP-0133-00135-1, "Miniature Single-Cell, Fully Integrated Li-Ion, Li-Polymer Charge Management Controller, 4.35V, 5-Pin SOT-23, Industrial Temperature, Tape and Reel", Code_IPC=SOT23-5, DatasheetVersion="revE, Sep-2008", PackageDescription="5-Lead Plastic Small Outline Transistor (OT) [SOT-23]", PackageReference=SOT-23-OT5, PackageVersion="revBB, Aug-2009"
U2: library part KM_ISL9110, "L12.3x3C"
U3: library part CMP-0237-00250-3, "ARM Cortex-M3 32-bit MCU, 128 KB Flash, 20 KB Internal RAM, 37 I/Os, 48-pin LQFP, -40 to 85 degC, Tray", I/Os (High Current)=37, Operating Frequency(F) (Processor speed) (MHz)=72, Supply Voltage(Vcc) min (V)=2, A/D Converter="2x12-bit (10 Channel)", ComponentLink1Description="Manufacturer URL", ComponentLink1URL=http://www.st.com/web/en/home.html, ComponentLink2Description=Datasheet, ComponentLink2URL=http://www.st.com/st-web-ui/static/active/en/resource/technical/document/datasheet/CD00161566.pdf, ComponentLink3Description="Package Specification", ComponentLink3URL=http://www.st.com/st-web-ui/static/active/en/resource/technical/document/datasheet/DM00058181.pdf, Core="ARM Cortex-M3", DatasheetVersion="Rev. 16", FLASH Size (Prog) (kB)=128, Internal RAM Size (kB)=20, Mounting Technology="Surface Mount", PackageDescription="48-Pin Low Profile Quad Flat Package, 7 x 7 mm Body, 0.5 mm Pitch", PackageReference=LQFP48, PackageVersion="Rev. 6, 06/2013", Packing=Tray, PartNumber=STM32F103CBT6
U4: library part JD_TRF37D73_WSON-8
U5: library part CMP-0284-00069-1, "1 MHz to 10 GHz, 45 dB Log Detector/Controller, 6ns Response Time, CP-8-1, Pb-Free, 3000 Reel", RF Frequency (MHz)="1 to 10000", Supply Current=22mA, Temp Stability (dB)=500mdB, Voltage Supply (V)="3 to 5.5", ComponentLink1Description="Manufacturer URL", ComponentLink1URL=www.analog.com, ComponentLink2Description=Datasheet, ComponentLink2URL=http://www.analog.com/static/imported-files/data_sheets/AD8319.pdf, ComponentLink3Description="Package Specification", ComponentLink3URL=http://www.analog.com/static/imported-files/packages/PKG_PDF/LFCSP(CP)/CP-8/CP_8_1.pdf, DatasheetVersion="Rev. B", Dynamic Range (dB)=45dB, PackageDescription="8-Lead Lead Frame Chip Scale Package [LFCSP_VD]", PackageReference=CP-8-1, PackageVersion=031207-A, Product Description="Available in Die", Response Time (ns typ)=6ns
U6: library part ZW_CP2102N-A02-GQFN20R

## Free pads (board coordinates)
  round 0.6 hole 0.3: 2(65.7,7.93) 2(66.275,28.835) 2(67.2,11.83) 2(68.28,12.93) 2(72.21,6.09) 2(83.36,8.18) 2(90.03,7.34)
  round 1.524 hole 4.5 unplated: 3(3,3) 3(3,77) 3(107,3) 3(107,77)

## Via types
v1: diameter 0.711, hole 0.3, Top Layer to Bottom Layer, 16 vias
v2: diameter 0.6, hole 0.3, Top Layer to Bottom Layer, 7 vias
v3: diameter 1.27, hole 0.711, Top Layer to Bottom Layer, 1 vias

## Nets (pads, with @x,y where several pads share a name; then routed paths per layer and width w, separated by ;. In a path a pad name is that pad's centre, name@x,y a point inside that pad or via, vN(x,y) a via of type N, cw(c..) or ccw(c..) an arc to the next point about the centre after c; other vN are vias at no path point)
3V3: C4.1 C5.1 C6.2 C7.2 C8.2 C9.1 C10.2 C21.1 J4.1 L2.2 R3.2 R4.2 R6.2 R10.1 U2.1 U2.12 U3.9 U3.24 U3.36 U3.48 | length 6.3
  Top Layer w0.15: 25.718,8.58 U2.1@26.16,8.58
  Top Layer w0.2: 37.406,39.95 37.431,39.975
  Top Layer w0.25: U3.36 63.385,31.675 63.605,31.895 63.605,32.395
  Top Layer w0.3: 25.718,8.58 25.693,8.555 25.411,8.555 25.236,8.731 25.236,9.156 26.27,10.19 C4.1 ; 63.605,32.395 64.83,32.395 C8.2
BUZZER: R13.1 U3.40
GND: BT1.1 C1.2 C2.2 C3.2 C4.2 C5.2 C6.1 C7.1 C8.1 C9.2 C10.1 C12.1 C14.1 C15.1 C17.1 C18.2 C19.2 C20.1 C21.2 C22.2 C23.2 C24.1 C25.1 C26.2 C27.1 C28.2 D2.1 D5.1 D6.1 D7.1 D8.1 D9.1 D10.1 J1.5 J2.5 J4.3 J4.9 P1.1 pad.2@65.7,7.93 pad.2@72.21,6.09 pad.2@83.36,8.18 pad.2@90.03,7.34 Q1.2 R2.2 R5.2 R7.1 R11.2 R19.2 R23.1 R26.2 U1.2 U2.3 U2.11 U3.8 U3.23 U3.35 U3.47 U4.9 U5.2 U5.9 U6.3 U6.12 U6.13 U6.21 | length 23.4
  Top Layer w0.15: U2.11 29.51,8.13
  Top Layer w0.2: v1(28.106,38.346) 29.656,38.346 C21.2 ; C14.1 33.585,37.95 34.535,38.9 36.485,38.9 37.135,38.25 37.256,38.25 37.541,37.965 C15.1@37.541,37.919 ; Q1.2 34.275,70.2 34.986,70.911 34.986,71.361 ; D7.1 D7.1@56.305,75.35 ; D6.1@59.99,75.39 D6.1 ; J2.5 88.26,7
  Top Layer w0.25: U3.35 63.235,31.175
  Top Layer w0.3: C4.2 27.77,10.19 28.655,9.305 29.05,9.305 29.76,8.596 29.76,8.38 29.51,8.13 ; 63.377,31.15 63.602,31.15 63.722,31.27 C8.1 ; pad.2@65.7,7.93 67.15,7.93 D2.1 ; pad.2@72.21,6.09 72.705,6.085 J1.5 ; pad.2@83.36,8.18 83.36,9.58 D5.1 ; 88.26,7 88.6,7.34 pad.2@90.03,7.34
  Bottom Layer w0.2: 31.56,31.075 31.985,31.075
  other v1: 30.61,29.8 35.485,38.9
GPIO_USB: R21.1 U3.31 | length 4.4
  Top Layer w0.15: U3.31 63.196,29.175
  Top Layer w0.2: 63.196,29.175 63.342,29.029 63.364,29.05 64.543,29.05 64.66,28.933 64.66,27.596 64.827,27.429 65.131,27.429 R21.1@65.19,27.37
LD1: R14.1 U3.41
LD2: R15.1 U3.42
LD3: R16.1 U3.43
LD4: R17.1 U3.45
LD5: R18.1 U3.46
M_CTS/U_RTS: U3.26 U6.16 | length 12.1
  Top Layer w0.15: U3.26 63.335,26.675 63.46,26.55 63.46,26.546 63.586,26.42
  Top Layer w0.2: 63.586,26.42 64.417,25.589 65.031,25.589 65.149,25.472 65.149,21.791 65.66,21.279 65.66,17.82 65.61,17.77 U6.16
M_RTS/U_CTS: U3.27 U6.15 | length 12.6
  Top Layer w0.2: U3.27@62.335,27.198 62.349,27.185 63.008,27.185 63.024,27.2 63.443,27.2 64.604,26.039 65.302,26.039 65.599,25.742 65.599,21.977 66.11,21.466 U6.15
M_RX/U_TX: U3.22 U6.18 | length 11.5
  Top Layer w0.2: U3.22 60.06,23.59 60.045,23.575 60.045,20.56 64.715,15.89 U6.18
M_TX/U_RX: U3.21 U6.17 | length 11.6
  Top Layer w0.15: 59.56,23.73 U3.21
  Top Layer w0.2: v2(59.308,22.237) 59.308,23.478 59.56,23.73 ; v2(60.75,21.37) 61.235,20.885 61.235,20.165 65.01,16.39 U6.17
  Bottom Layer w0.2: v2(59.308,22.237) 60.15,21.395 60.725,21.395 v2(60.75,21.37)
NetANT1_2: ANT1.2 C11.1
NetBT1_2: BT1.2 C2.1 SW1.2 U1.3 | length 13.5
  Top Layer w0.2: SW1.2 38.134,11.67 38.764,11.04 BT1.2 47.726,11.04 C2.1 47.966,11.28 U1.3
NetC3_1: C3.1 R25.1 SW1.1 U2.5 U2.6 U2.9 U2.10 | length 31.7
  Top Layer w0.15: 25.86,6.905 25.8,6.905 25.57,6.675 25.57,6.44 25.635,6.505 26.135,6.505 U2.6 ; U2.9@28.96,7.355 29.35,7.355 29.365,7.34 30.23,7.34 ; U2.10@28.96,7.7 29.35,7.7 29.355,7.705 29.727,7.705 29.792,7.77 30.23,7.77
  Top Layer w0.2: 25.57,6.44 C3.1 25.58,4.71 25.58,3.597 25.697,3.48 26.06,3.48 26.83,2.71 28.05,2.71 30.23,4.89 30.23,7.34 30.23,7.77 R25.1 31.55,16.1 31.98,15.67 SW1.1
NetC11_2: C11.2 U4.2
NetC12_2: C12.2 R3.1 U4.1
NetC13_1: C13.1 L3.1 U4.7 | length 4.5
  Top Layer w0.2: U4.7@31.46,30.6 C13.1 33.534,33.05
NetC13_2: C13.2 C16.1 R5.1 | length 4
  Top Layer w0.2: C13.2 R5.1 37.21,32.55 C16.1
NetC14_2: C14.2 C15.2 L3.2 R4.1 | length 6.1
  Top Layer w0.2: L3.2 C14.2 37.51,36.75 C15.2@37.56,36.7
NetC16_2: C16.2 U5.1 | length 2.3
  Top Layer w0.2: C16.2 38.685,32.375 39.841,31.219 40.316,31.219 U5.1
NetC17_2: C17.2 R7.2 U5.6 U5.8 | length 2.9
  Top Layer w0.2: U5.6 42.054,30.181 42.5,30.181 42.827,29.854 42.827,29.229 42.855,29.201 42.88,29.201 43.181,28.9 ; U5.8 42.91,31.2
NetC18_1: C18.1 C19.1 R6.1 U5.7 | length 3.9
  Top Layer w0.2: U5.7 43.656,30.7 C19.1 ; 44.785,30.85 46.66,30.85 C18.1
NetC20_2: C20.2 U5.3 | length 3.7
  Top Layer w0.2: C20.2 39.085,29.5 39.785,30.2 U5.3
NetC23_1: C23.1 C24.2 R24.1 U6.6 | length 25.7
  Top Layer w0.2: U6.6 68.69,13.81 68.69,13.439 69.014,13.115 69.014,11.731 69.71,11.035 69.71,10.7 69.75,10.66 69.75,10.065 69.867,9.948 70.387,9.948 71.938,8.397 71.938,7.067 72.055,6.95 72.282,6.95 72.647,6.586 72.708,6.585 72.912,6.585 73.205,6.292 73.205,6.027 73.46,5.772 74.303,5.772 74.42,5.889 74.42,5.941 75.55,7.071 75.55,10.771 74.805,11.516 74.805,11.785 C23.1 74.43,12.36 73.712,13.078 73.542,13.078 73.2,13.42 C24.2 73.2,16.1 72.993,16.307 71.887,16.307 R24.1
NetC27_2: C27.2 F1.2 R12.2 | length 8
  Top Layer w0.2: R12.2 45.885,48.575 F1.2 49.86,48.7 C27.2
NetC28_1: C28.1 F1.1 U3.5
NetD1_1: D1.1 R1.1 | length 2.1
  Top Layer w0.2: R1.1 52.995,4.775 D1.1
NetD5_4: D5.4 J2.1 R20.1 | length 13.4
  Top Layer w0.2: R20.1 81.07,5.69 82.945,7.565 82.945,7.635 ; D5.4 82.34,11.8 81.99,11.45 81.99,8.59 82.945,7.635 ; J2.1 85.66,7.09 83.49,7.09 82.945,7.635
NetD6_2: D6.2 R14.2
NetD7_2: D7.2 R15.2
NetD8_2: D8.2 R16.2
NetD9_2: D9.2 R17.2
NetD10_2: D10.2 R18.2
NetL1_1: L1.1 U2.4 | length 5.4
  Top Layer w0.15: L1.1 24.715,5.69 25.145,6.12 25.145,6.559 25.17,6.584 25.17,6.841 25.623,7.293 25.721,7.293 25.758,7.33 U2.4
NetL1_2: L1.2 U2.2 | length 4.8
  Top Layer w0.15: L1.2 21.94,9.23 24.06,9.23 25.16,8.13 U2.2
NetL2_1: L2.1 Q1.3 | length 7.2
  Top Layer w0.2: 24.35,69.15 31.4,69.15 Q1.3
NetQ1_1: Q1.1 R13.2 | length 2.2
  Top Layer w0.2: Q1.1 33.925,68.275 36.05,68.275
NetR1_2: R1.2 U1.1 | length 3.2
  Top Layer w0.2: U1.1 51.15,9.35 R1.2
NetR2_1: R2.1 U1.5 | length 2.6
  Top Layer w0.2: U1.5 53.52,7.03 R2.1
NetR8_1: R8.1 U5.4 | length 2.1
  Top Layer w0.2: U5.4 40.489,29.7 40.535,29.654 R8.1
NetR8_2: R8.2 R9.1 U5.5 | length 2.1
  Top Layer w0.2: R8.2 41.835,29.654 41.881,29.7 U5.5
NetR11_1: R11.1 U3.44
NetR12_1: R12.1 U3.6
NetR22_1: R22.1 R23.2 U6.8 | length 9.7
  Top Layer w0.2: U6.8 70.7,15.39
  Top Layer w0.25: 70.7,15.39 70.97,15.12 R22.1 71.04,14.27 71.91,14.27 72.45,13.73 72.45,12.2 73.87,10.78 R23.2
NRST: C22.1 J4.10 P1.2 R10.2 U3.7
PA1_ADC: R9.2 U3.11 | length 0.5
  Bottom Layer w0.2: 45.381,30.17 45.756,29.795
PA13/SWDIO: J4.2 U3.34
PA14/SWDCLK: J4.4 U3.37
PWDN: U3.12 U4.5 | length 1
  Top Layer w0.2: U4.5 31.685,29.6 31.71,29.575 31.71,29.45 31.899,29.261 31.899,28.829
PWR_MSR: R25.2 R26.1 U3.19 | length 35.3
  Top Layer w0.15: R26.1 27.11,18.1 R25.2 39.039,18.1 ccw(c39.98,19.17) 40.921,18.1 52.932,18.1 58.154,23.322 58.282,23.322 58.44,23.48 58.56,23.6 U3.19
RSTb: R24.2 U6.9 | length 2.2
  Top Layer w0.2: U6.9 69.52,15.89 69.68,16.05 69.68,16.173 69.797,16.29 70.31,16.29 R24.2
SUSPEND: U3.25 U6.14 | length 13.3
  Top Layer w0.15: U3.25 62.354,26.156 63.075,26.156 63.076,26.154 63.251,26.154 63.391,26.014 63.391,25.979
  Top Layer w0.2: 63.391,25.979 64.231,25.139 64.581,25.139 64.699,25.022 64.699,21.604 65.21,21.093 65.21,20.759 65.037,20.586 65.037,20.135 v2(64.96,20.059) ; U6.14 66.61,18.949 67.095,19.434 67.095,19.797 66.84,20.052 v2(66.84,20.16)
  Bottom Layer w0.2: v2(64.96,20.059) 65.011,20.109 66.789,20.109 v2(66.84,20.16)
TDI/PA15: J4.8 U3.38
TDO/SWO/PB3: J4.6 U3.39
USB_N: D5.2 J2.2 U3.32 | length 42.8
  Top Layer w0.15: U3.32 63.844,29.675
  Top Layer w0.381: 63.844,29.675 66.815,29.675 67.038,29.452 67.038,27.348 66.77,27.08 66.77,22.482 71.457,17.795 73.318,17.795 75.836,15.277 81.476,15.277 84.071,12.682 84.071,11.037 84.82,10.287 84.82,9.86 D5.2 85.34,9.86 85.34,10.159 85.563,10.383 86.07,10.383 86.318,10.135 86.318,5.877 J2.2
USB_P: D5.3 J2.3 pad.2@66.275,28.835 R21.2 U3.33 | length 48.2
  Top Layer w0.15: U3.33 62.354,30.194 63.075,30.194 63.081,30.2 63.395,30.2
  Top Layer w0.381: 63.395,30.2 63.505,30.31 67.078,30.31 67.673,29.715 67.673,27.04 ; R21.2@65.257,28.87 R21.2 66.217,28.87 pad.2@66.275,28.835 ; v3(68.56,28.38) 68.39,28.21 68.39,27.263 68.167,27.04 67.673,27.04 ; J2.3 86.953,5.878 86.953,10.398 86.333,11.018 85.563,11.018 85.34,11.241 85.34,11.541 D5.3 85.08,12.05 84.706,12.424 84.706,12.945 81.739,15.912 76.099,15.912 73.581,18.43 71.72,18.43 67.405,22.745 67.405,26.817 67.628,27.04 67.673,27.04
  Bottom Layer w0.381: pad.2@66.002,28.815 66.005,28.835 67.98,28.35 68.53,28.35 v3(68.56,28.38)
USB_UART_N: D2.2 J1.2 pad.2@67.2,11.83 pad.2@68.28,12.93 U6.5 | length 13.7
  Top Layer w0.15: U6.5 67.61,13.303 67.732,13.182
  Top Layer w0.3: 67.732,13.182 67.733,13.18 67.949,13.18 68.199,12.93 pad.2@68.28,12.93
  Top Layer w0.35: pad.2@67.2,11.83 67.885,11.145 67.885,9.464 68.635,8.714 68.635,8.265 D2.2
  Top Layer w0.381: D2.2 69.17,8.25 69.17,8.549 69.393,8.772 69.9,8.772 70.762,7.91 70.762,4.647 J1.2
  Bottom Layer w0.35: pad.2@67.2,11.83 67.2,11.84 68.28,12.92 pad.2@68.28,12.93
USB_UART_P: D2.3 J1.3 U6.4 | length 11.7
  Top Layer w0.15: U6.4 67.13,14.07 67.13,13
  Top Layer w0.3: 67.13,13 68.489,11.641
  Top Layer w0.35: 68.489,11.641 68.489,10.861 68.91,10.44 D2.3
  Top Layer w0.381: D2.3 69.17,9.93 69.17,9.631 69.393,9.407 70.163,9.407 71.397,8.173 71.397,4.648 J1.3
VBUS2: C1.1 C25.2 C26.1 D1.2 D2.4 J1.1 R22.2 U1.4 U6.7 | length 43.7
  Top Layer w0.2: U1.4 53.55,11.25 54.63,11.25 ; D1.2 54.63,4.64 54.63,11.25 ; C26.1 C25.2 C1.1 54.63,11.25 ; v2(66.46,11.24) 66.537,11.163 66.973,11.163 66.973,10.153 D2.4@66.96,10.14 ; U6.7 68.43,14.87 69.19,14.87 69.464,14.596 69.464,12.41 69.674,12.2 R22.2 70.88,12.2 70.38,11.7 v2(70.38,11.03)
  Top Layer w0.25: C26.1@63.24,10.8 63.24,9.24 63.97,8.51 64.92,8.51
  Top Layer w0.3: D2.4@66.96,10.14 65.57,10.14 64.92,9.49 64.92,8.51 64.92,6.9 65.71,6.11 69.929,6.11 70.105,5.934 J1.1
  Bottom Layer w0.2: v2(66.46,11.24) 66.52,11.18 69.787,11.18 69.897,11.29 70.063,11.29 70.323,11.03 v2(70.38,11.03)
VBUS_USB2: R19.1 R20.2 U3.30 | length 31.4
  Top Layer w0.15: U3.30@63.039,28.625 63.171,28.625 63.193,28.603 63.404,28.603 63.519,28.488
  Top Layer w0.381: 63.519,28.488 63.566,28.488 63.588,28.51 63.689,28.51 64.12,28.08 64.12,27.288 64.828,26.579 65.526,26.579 66.139,25.966 66.139,22.201 71.176,17.164 73.057,17.164 77.52,12.701 R19.1 77.57,7.69 R20.2